# Altium PCB PCB1.PcbDoc
Units mm, origin at the board's own origin, x right, y up, seen from the top; angles counter-clockwise.
Board outline 62.61 x 90.04 mm, 2 copper layers (Top Layer, Bottom Layer); 13 components, 13 nets, 29 pads, 0 vias.
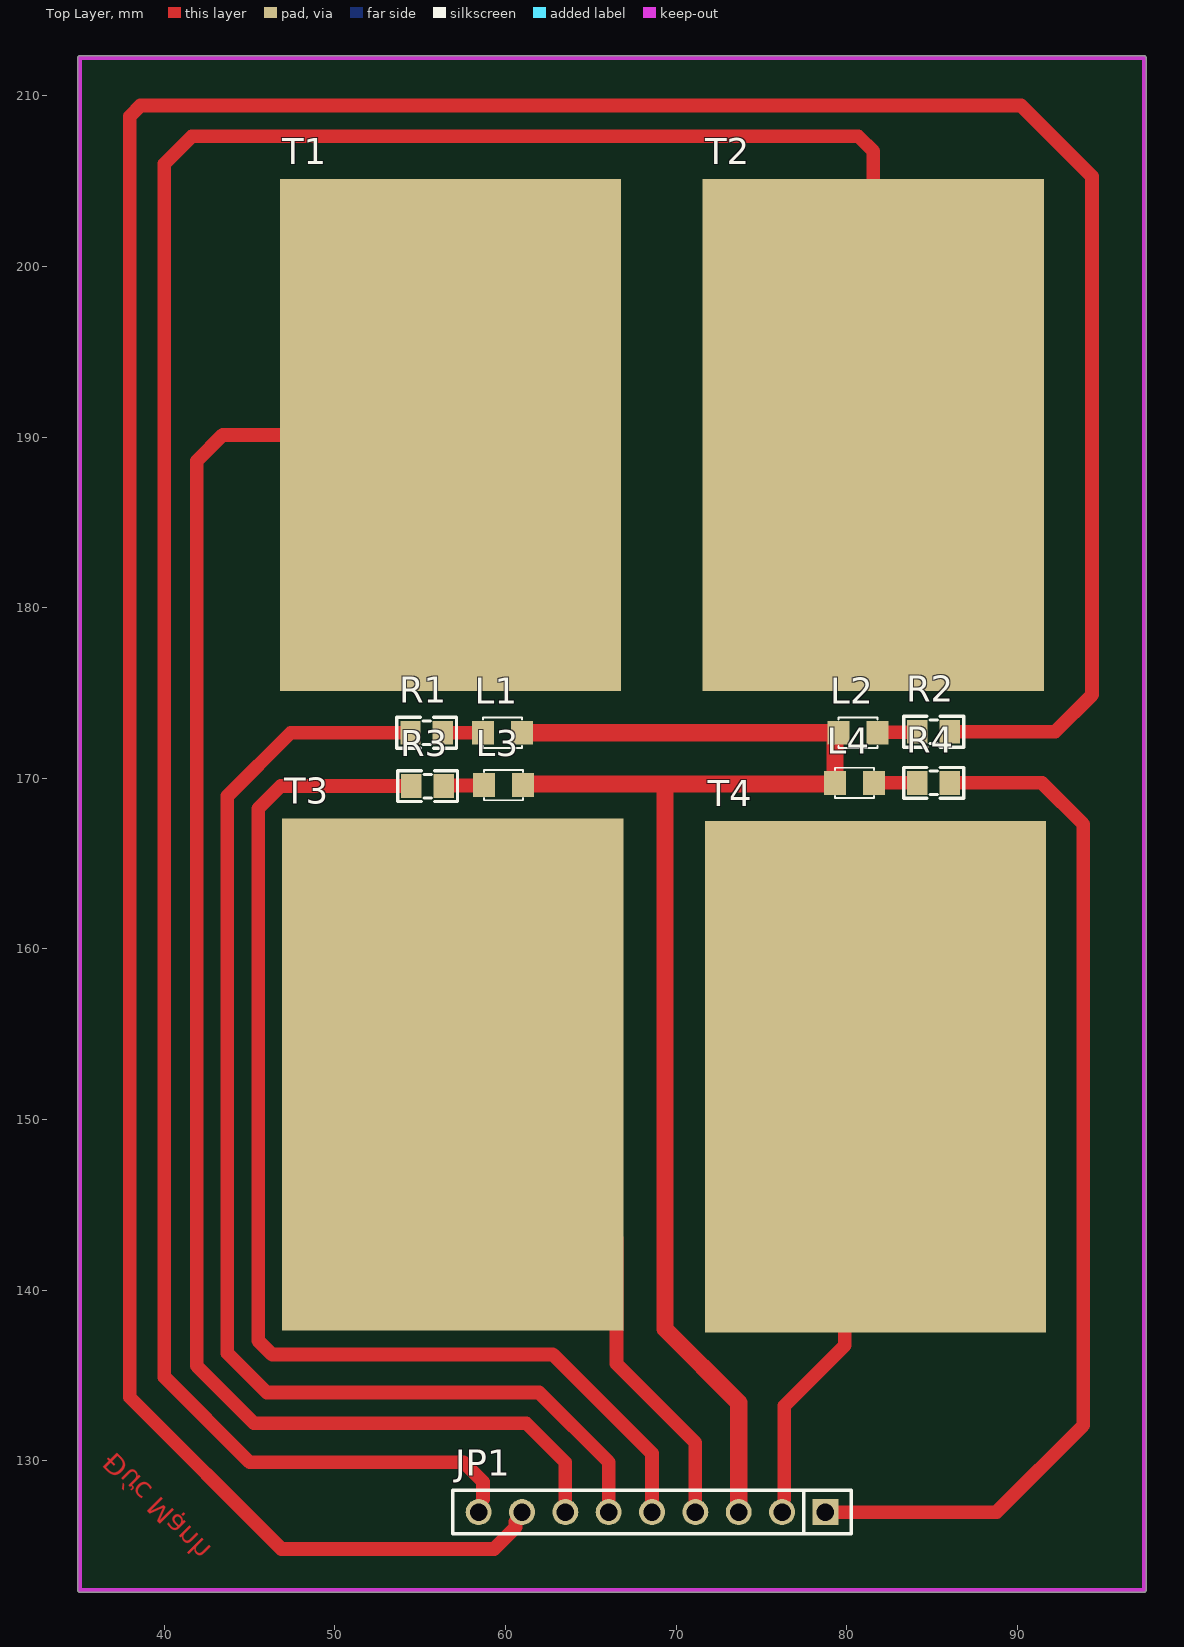
[diagram p0: Top Layer view]
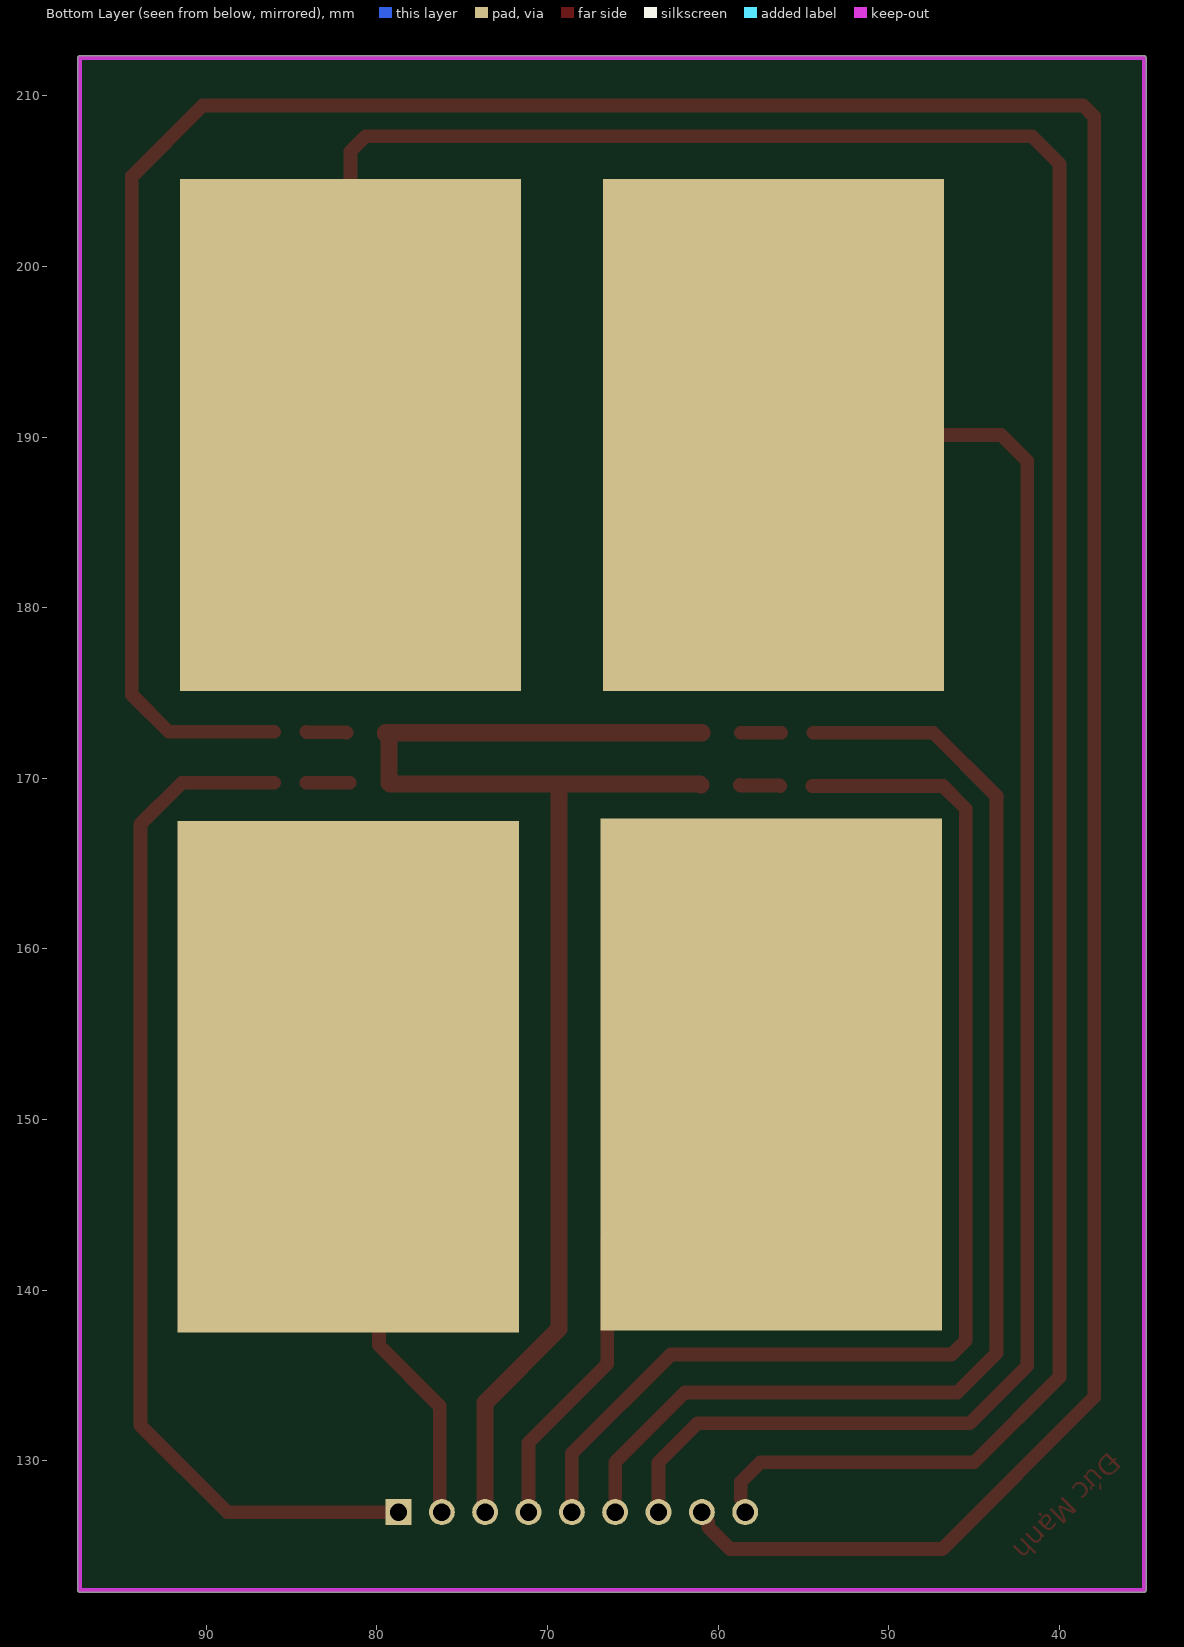
[diagram p1: Bottom Layer view, seen from below]
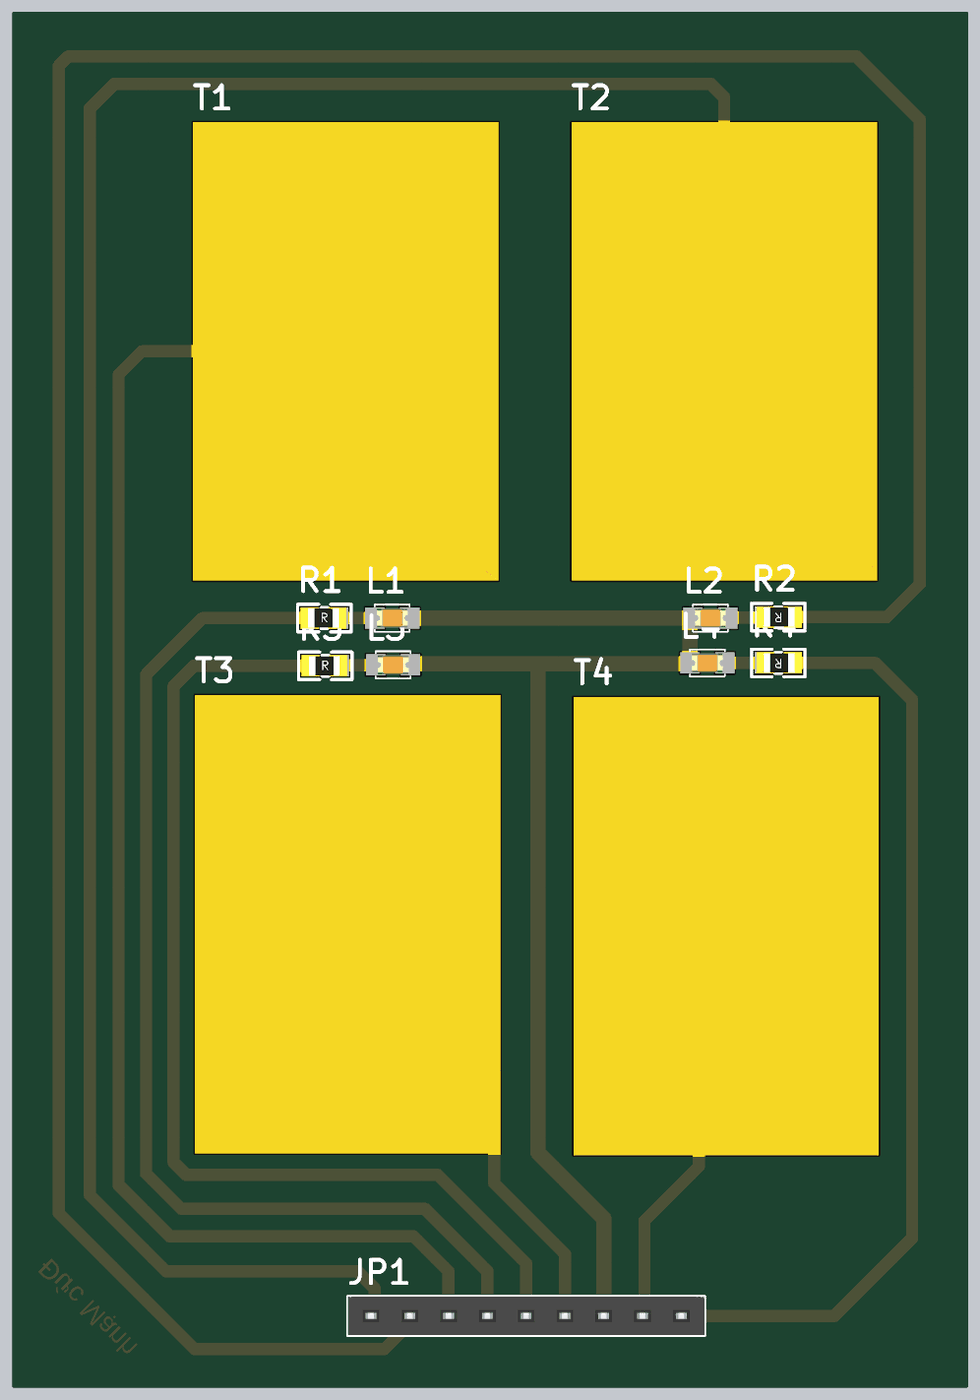
[diagram p2: 3D render of the assembled board from above, using the file's embedded part models]

## Layer stack, top to bottom
Top Solder: solder mask 0.0102, Solder Resist, Dk 3.5
Top Layer: signal copper 0.0356
Dielectric 1: dielectric 0.32, FR-4, Dk 4.8
Bottom Layer: signal copper 0.0356
Bottom Solder: solder mask 0.0102, Solder Resist, Dk 3.5

## Board outline
35.052,122.301 cw(c35.052,122.428) 34.925,122.428 34.925,212.217 cw(c35.052,212.217) 35.052,212.344 97.409,212.344 cw(c97.409,212.217) 97.536,212.217 97.536,122.428 cw(c97.409,122.428) 97.409,122.301

## Design rules (kind name [scope] priority, off if disabled: settings)
Clearance [All] p1: gap=1 ignorepadtopadclearanceinfootprint=FALSE
PolygonConnect [All] p1: connectstyle=Relief reliefconductorwidth=0.254 reliefentries=4 polygonreliefangle="90 Angle" airgapwidth=0.254
RoomDefinition Sheet1 [InComponentClass('Sheet1')] p1: confinementstyle=ConfineIn formatcopy=TRUE lockcomponents=FALSE outline 0,0 50.8,0 50.8,25.4 0,25.4
RoutingVias [All] p1: holewidth=0.711 width=1.27 viastyle="Through Hole" minholewidth=0.711 minwidth=1.27 maxholewidth=0.711 maxwidth=1.27
SolderMaskExpansion [All] p1: expansion=0.102 istentingtop=FALSE
Width VCC5 [InNet('VCC5')] p1: maxlimit=1 minlimit=1 preferedwidth=1
Width VCC_IN [InNet('VCC_IN')] p2: maxlimit=1 minlimit=1 preferedwidth=1
Width VCC33 [InNet('VCC5')] p3: maxlimit=1 minlimit=1 preferedwidth=1
Width GND [InNet('GND')] p4: maxlimit=1 minlimit=1 preferedwidth=1
Width [All] p5: maxlimit=0.8 minlimit=0.8 preferedwidth=0.8
30 further rules are at their usual default settings.

## Components (designator, comment, footprint, x,y, rotation, side; value= is the part's Value field where it differs from the comment)
JP1 "JP 1x9 2.54" "JP 1x9 CT" 68.58,127 r180 top
L1 "LED 0805" LED-0805-Orange 58.674,172.669 r0 top
L2 "LED 0805" LED-0805-Orange 81.788,172.669 r180 top
L3 "LED 0805" LED-0805-Orange 58.731,169.605 r0 top
L4 "LED 0805" LED-0805-Orange 81.591,169.732 r180 top
R1 "33k" "tro smd 0805" 55.372,172.731 r0 top
R2 "33k" "tro smd 0805" 85.09,172.668 r180 top
R3 "33k" "tro smd 0805" 55.429,169.606 r0 top
R4 "33k" "tro smd 0805" 85.09,169.671 r180 top
T1 "F1A" Touch 57.769,181.119 r180 top value=Fuse
T2 "F1A" Touch 82.55,181.119 r180 top value=Fuse
T3 "F1A" Touch 57.896,143.637 r180 top value=Fuse
T4 "F1A" Touch 82.677,143.51 r180 top value=Fuse

## Footprints (in the part's own frame and the unit in brackets; to place one, negate y for a bottom-side part, rotate by r counter-clockwise, add the part's x,y. Pads: shape width x height; smd on the part's side, far side on the other; paste and mask are expansions set on the pad)
"JP 1x9 CT" [mm] "9 row, straight, gold plating"
  rect 1.52x1.52 hole 1.02: 1(-10.16,0)
  round 1.52 hole 1.02: 2(-7.62,0) 3(-5.08,0) 4(-2.54,0) 5(0,0) 6(2.54,0) 7(5.08,0) 8(7.62,0) 9(10.16,0)
  silkscreen extent -11.68,-1.27 11.68,1.27, body extent -11.68,-1.25 11.68,1.25, height 8.51
LED-0805-Orange [mil]
  rect 50x55 smd: 1(0,0) 2(90,0)
  silkscreen extent 0,-35 90,35, body extent 5,-25 85,25, height 43
Touch [mm]
  rect 20x30 all layers, no hole: 1(1,-9)
"tro smd 0805" [mm]
  rect 1.2x1.4 smd: 1(-0.946,-0.061) 2(0.954,-0.061)
  silkscreen extent -1.75,-0.97 1.75,0.84, body extent -1.56,-0.76 1.44,0.64, height 0.53

## Part data
JP1: library part "JP 1x9 2.54 Cai Thang", "Cắm", Chung_Loai=Cắm, Don_Vi=Con, Ma_Hang=MH004006, Ten_Linh_Kien="Jump Đơn Cái 2.54MM 1x20P Thẳng"
L1 L2 L3 L4: library part "LED 0805 Cam", "Dán", Chung_Loai=Dán, Don_Vi=Con, Ma_Hang=MH002328, Ten_Linh_Kien="LED 0805 Màu Cam ( Orange)"
R1 R2 R3 R4: library part "Tro 0805 1% 33k", "Dán", Chung_Loai=Dán, Don_Vi=Con, Ma_Hang=MH005478, So_Chan=2, Ten_Linh_Kien="Trở 0805 1% 33k"
T1 T2 T3 T4: library part Touch, "Fuse", Designed by=VanDungEvn

## Nets (pads, with @x,y where several pads share a name; then routed paths per layer and width w, separated by ;. In a path a pad name is that pad's centre, name@x,y a point inside that pad or via, vN(x,y) a via of type N, cw(c..) or ccw(c..) an arc to the next point about the centre after c; other vN are vias at no path point)
GND: JP1.3 L1.2 L2.2 L3.2 L4.2 | length 84.4
  Top Layer w1: L1.2 L2.2 79.502,172.606 79.305,172.408 L4.2 79.241,169.668 69.342,169.668 ; L3.2 61.08,169.668 69.342,169.668 ; JP1.3 73.66,133.406 69.342,137.724 69.342,169.668
LED_1: JP1.6 R1.1 | length 72.8
  Top Layer w0.8: R1.1 47.404,172.671 43.696,168.963 43.696,136.312 46.001,134.007 61.96,134.007 66.04,129.927 JP1.6
LED_2: JP1.8 R2.1 | length 200.9
  Top Layer w0.8: JP1.8 60.96,126.805 60.58,126.425 60.58,126.105 59.315,124.84 46.864,124.84 37.973,133.731 37.973,208.788 38.608,209.423 90.209,209.423 94.361,205.272 94.361,174.887 92.202,172.728 R2.1
LED_3: JP1.5 R3.1 | length 70
  Top Layer w0.8: R3.1 46.824,169.545 45.496,168.217 45.496,149.593 45.496,137.787 45.496,137.057 46.316,136.237 47.046,136.237 58.851,136.237 62.772,136.237 68.58,130.429 JP1.5
LED_4: JP1.1 R4.1 | length 61.3
  Top Layer w0.8: JP1.1 88.773,127 93.853,132.08 93.853,167.314 91.436,169.732 R4.1
NetL1_1: L1.1 R1.2 | length 2.3
  Top Layer w0.8: R1.2@56.327,172.67 L1.1
NetL2_1: L2.1 R2.2 | length 2.4
  Top Layer w0.8: L2.1 81.818,172.699 84.106,172.699 R2.2
NetL3_1: L3.1 R3.2 | length 2.4
  Top Layer w0.8: R3.2 56.413,169.575 58.701,169.575 L3.1
NetL4_1: L4.1 R4.2 | length 2.5
  Top Layer w0.8: L4.1 R4.2
TOUCH1: JP1.7 T1.1 | length 95.4
  Top Layer w0.8: T1.1 43.417,190.119 41.896,188.599 41.896,148.102 41.896,135.566 45.255,132.207 61.214,132.207 63.5,129.921 JP1.7
TOUCH2: JP1.9 T2.1 | length 152.5
  Top Layer w0.8: 58.674,127.762 58.674,128.778 57.531,129.921 44.996,129.921 40.005,134.912 40.005,206.012 41.617,207.623 80.667,207.623 81.55,206.74 T2.1
TOUCH3: JP1.4 T3.1 | length 31.5
  Top Layer w0.8: T3.1 66.496,143.037 66.496,135.688 71.12,131.064 JP1.4
TOUCH4: JP1.2 T4.1 | length 27
  Top Layer w0.8: 76.327,127.762 76.327,133.223 79.883,136.779 79.883,150.716 T4.1

## Keep-outs
Keep-Out Layer:
  lines w0.254: 35.052,122.428 35.052,212.217 97.409,212.217 97.409,125.857 97.409,122.428 35.052,122.428

## Other copper
Top Layer:
  text "Đức Mạnh" at 37.39,130.862 h2 r135